# Altium PCB TB_brd.PcbDoc
Units mil, origin at the board's own origin, x right, y up, seen from the top; angles counter-clockwise.
Board outline 4448.82 x 3897.64 mil, 2 copper layers (Top Layer, Bottom Layer); 40 components, 28 nets, 144 pads, 92 vias.
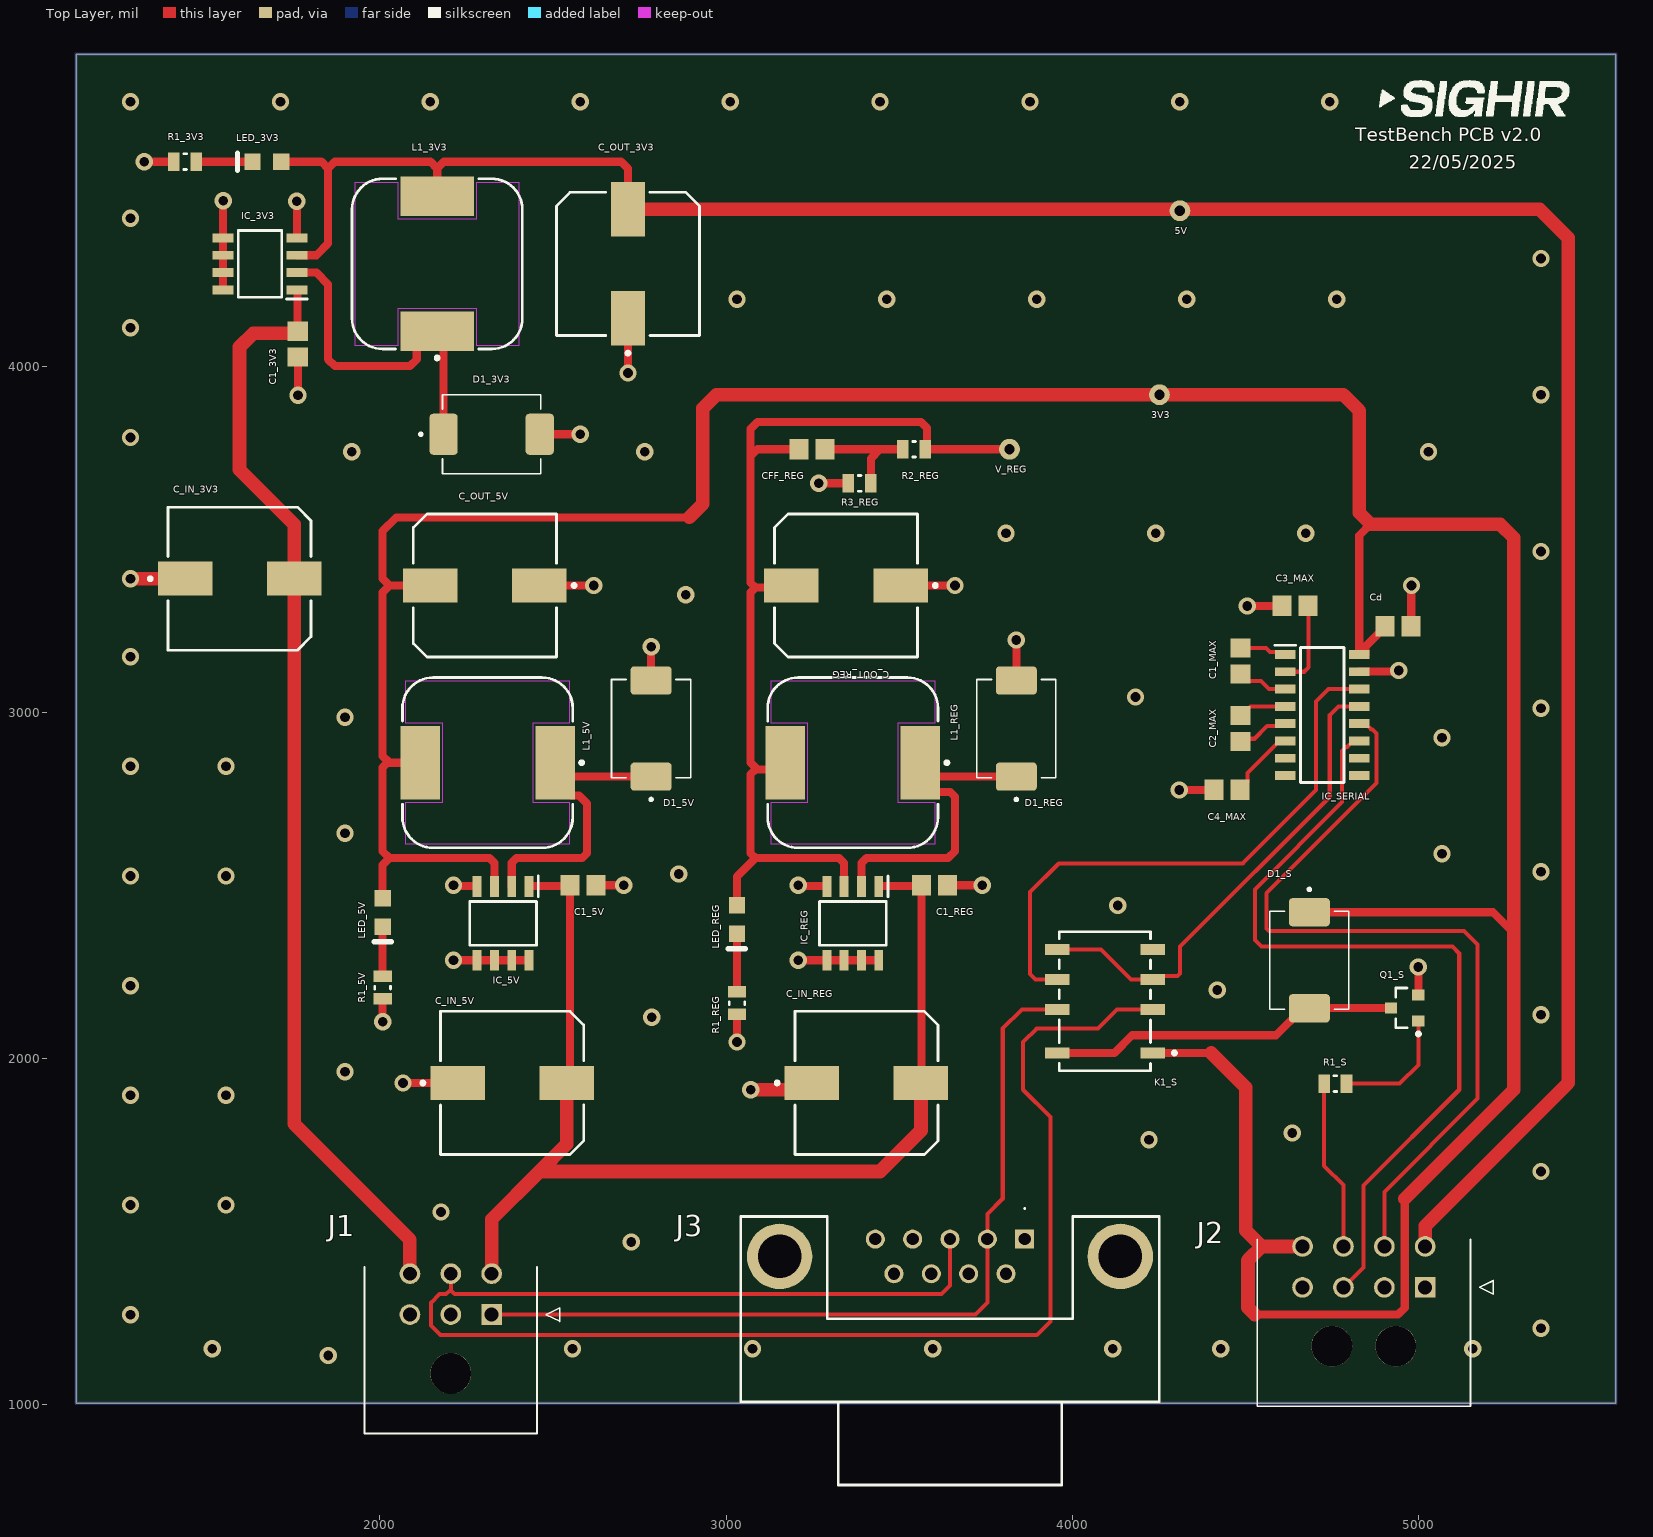
[diagram p0: Top Layer view]
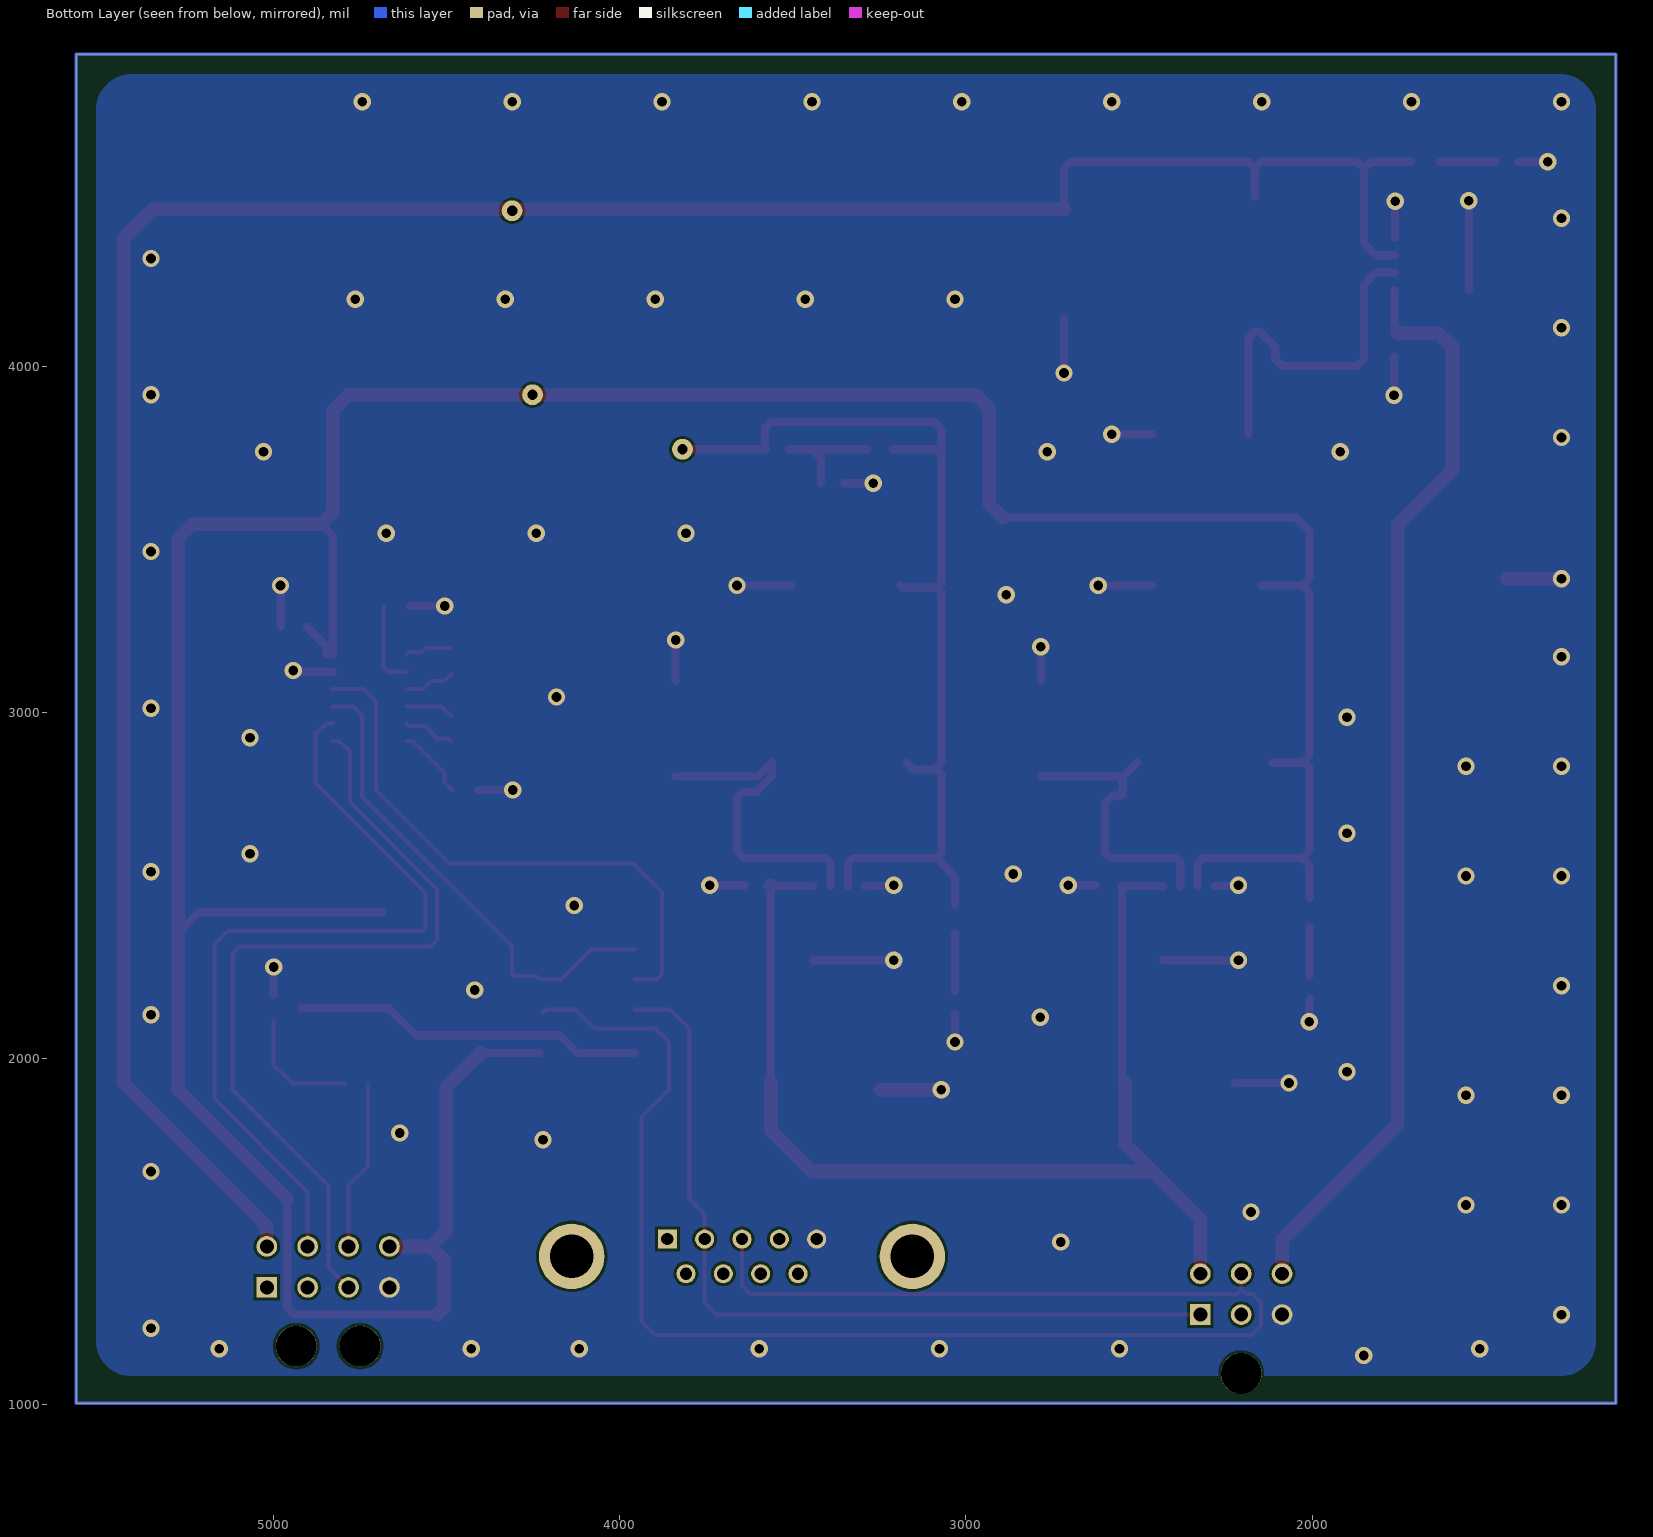
[diagram p1: Bottom Layer view, seen from below]
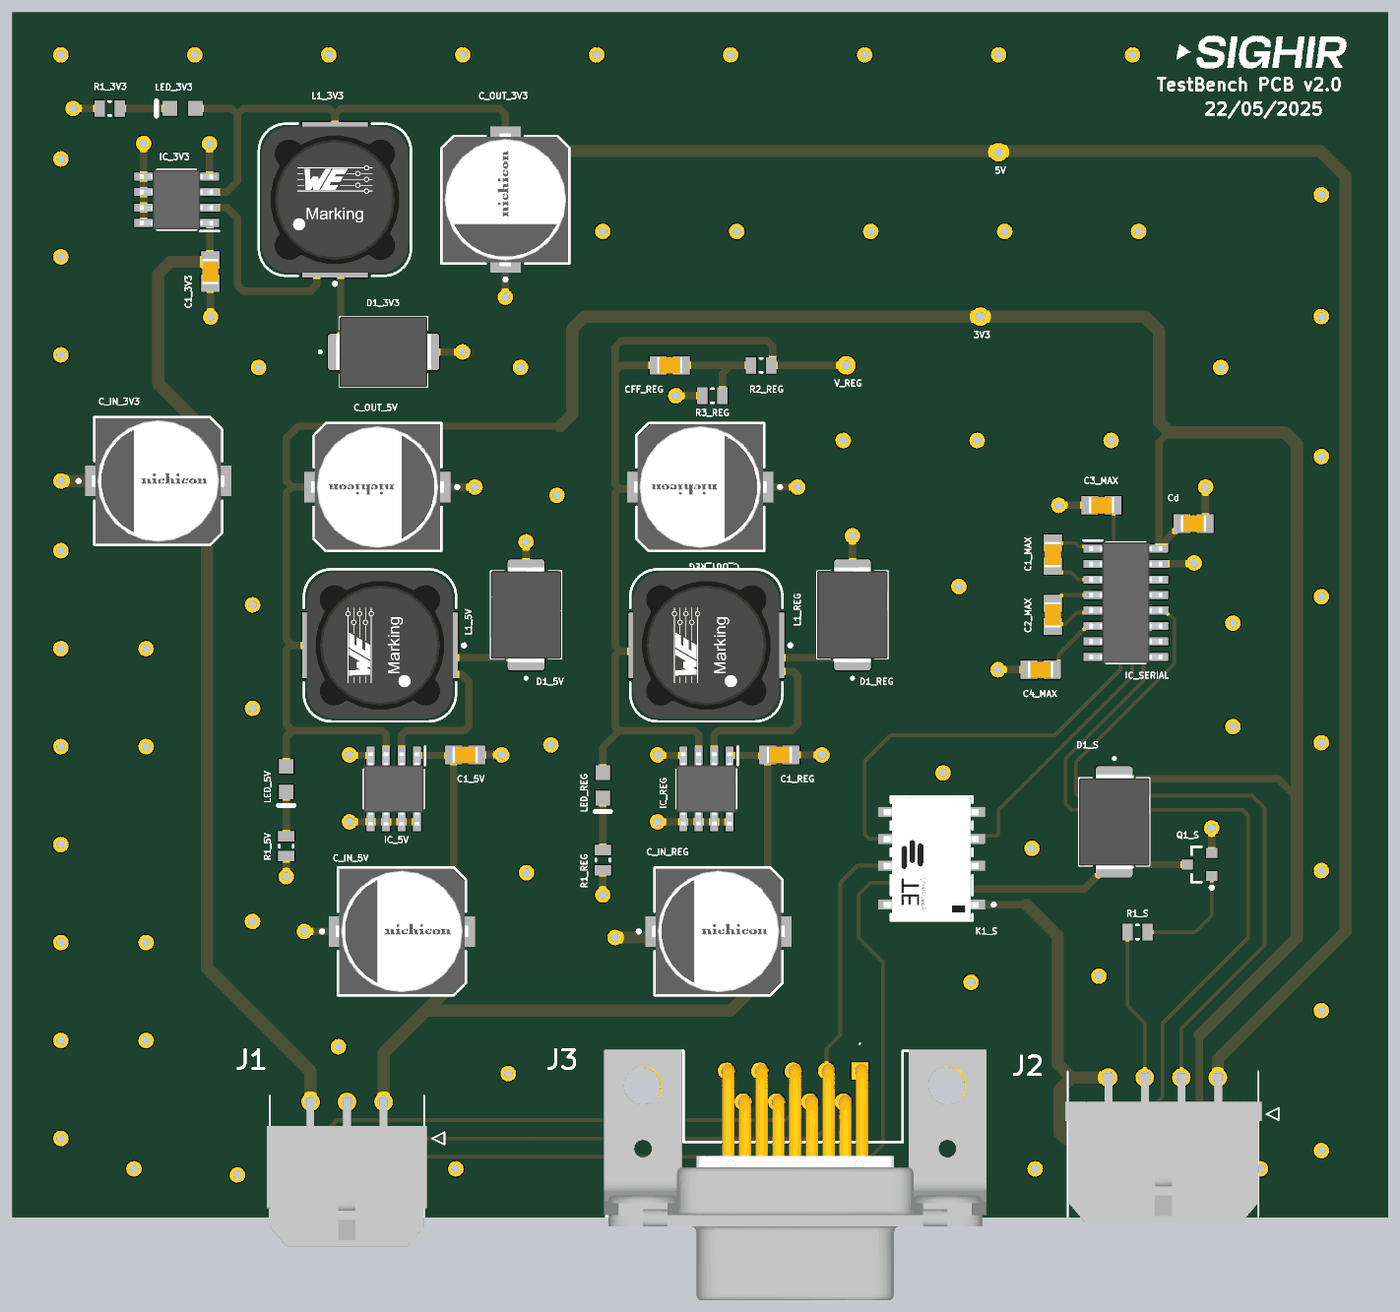
[diagram p2: 3D render of the assembled board from above, using the file's embedded part models]

## Layer stack, top to bottom
Top Solder: solder mask 0.4, Solder Resist, Dk 3.5
Top Layer: signal copper 1.4
Dielectric 1: dielectric 12.6, FR-4, Dk 4.8
Bottom Layer: signal copper 1.4
Bottom Solder: solder mask 0.4, Solder Resist, Dk 3.5

## Board outline
1122.05,1003.94 1122.05,4901.57 5570.87,4901.57 5570.87,1003.94

## Design rules (kind name [scope] priority, off if disabled: settings)
Clearance [All] p1: gap=7.87 ignorepadtopadclearanceinfootprint=FALSE
HoleSize [All] p1: absolutevalues=TRUE maxlimit=125.98 minlimit=1 maxpercent=80.000 minpercent=20.000
PolygonConnect [All] p1: connectstyle=Direct reliefconductorwidth=10 reliefentries=4 polygonreliefangle="90 Angle" airgapwidth=10
RoutingVias [All] p1: holewidth=28 width=50 viastyle="Through Hole" minholewidth=28 minwidth=50 maxholewidth=28 maxwidth=50
SilkToSolderMaskClearance [IsPad] p1: minsilkscreentomaskgap=7.87 clearancetoexposedcopper=TRUE
SolderMaskExpansion [All] p1: expansion=4 istentingtop=FALSE
SupplyNets "Schematic Supply Nets_5" [InNet('24V')] p1: voltage=0.000
SupplyNets "Schematic Supply Nets_4" [InNet('5V')] p2: voltage=0.000
SupplyNets "Schematic Supply Nets_3" [InNet('V_REG')] p3: voltage=0.000
SupplyNets "Schematic Supply Nets_2" [InNet('KEY_IN')] p4: voltage=0.000
SupplyNets "Schematic Supply Nets_1" [InNet('GND')] p5: voltage=0.000
SupplyNets "Schematic Supply Nets" [InNet('3V3_KEY')] p6: voltage=0.000
UnRoutedNet [All] p1: checkbadconnections=TRUE
Width [All] p1: maxlimit=39.37 minlimit=7.87 preferedwidth=11.81 minimp=50.000000 maximp=50.000000 favimp=50.000000
27 further rules are at their usual default settings.

## Components (designator, comment, footprint, x,y, rotation, side; value= is the part's Value field where it differs from the comment)
C1_3V3 "1uF/50V" CAPC2013X135X45LL10T25 1762.79,4063.22 r90 top
C1_5V "1uF/50V" CAPC2013X135X45LL10T25 2586.61,2500 r180 top
C1_MAX "0.1uF/50V" CAPC2013X135X45LL10T25 4486.22,3147.64 r270 top
C1_REG "1uF/50V" CAPC2013X135X45LL10T25 3602.36,2500 r180 top
C2_MAX "0.1uF/50V" CAPC2013X135X45LL10T25 4486.22,2952.76 r270 top
C3_MAX "0.1uF/50V" CAPC2013X135X45LL10T25 4643.7,3307.09 r180 top
C4_MAX "0.1uF/50V" CAPC2013X135X45LL10T25 4446.85,2775.59 r180 top
C_IN_3V3 "470uF/35V" FP-UCW1H221MNL1GS-MFG 1594.49,3385.83 r0 top
C_IN_5V "470uF/35V" FP-UCW1H221MNL1GS-MFG 2381.89,1929.13 r0 top
C_IN_REG "470uF/35V" FP-UCW1H221MNL1GS-MFG 3405.51,1929.13 r0 top
C_OUT_3V3 "270uF/35V" FP-UCW1H221MNL1GS-MFG 2716.54,4295.28 r90 top
C_OUT_5V "270uF/35V" FP-UCW1H221MNL1GS-MFG 2303.15,3366.14 r180 top
C_OUT_REG "270uF/35V" FP-UCW1H221MNL1GS-MFG 3346.46,3366.14 r180 top
Cd "0.1uF/50V" CAPC2013X135X45LL10T25 4940.94,3248.03 r180 top
CFF_REG "3.3nF/50V" CAPC2013X135X45LL10T25 3248.03,3759.84 r0 top
D1_3V3 "SK34-AQ" DIOM7958X250N 2322.83,3803.15 r0 top
D1_5V "SK34-AQ" DIOM7958X250N 2783.46,2952.76 r90 top
D1_REG "SK34-AQ" DIOM7958X250N 3838.58,2952.76 r90 top
D1_S "SK34-AQ" DIOM7958X250N 4685.04,2283.46 r270 top
IC_3V3 "XL1509-3V3E1" SOIC127P600X175-8N 1653.54,4295.28 r180 top
IC_5V "XL1509-5.0E1" SOIC127P600X175-8N 2355.71,2390.24 r270 top
IC_REG "XL1509-ADJE1" SOIC127P600X175-8N 3366.14,2390.24 r270 top
IC_SERIAL "MAX3232CSE+T" SOIC127P600X175-16N 4722.44,2992.13 r0 top
J1 "43045-0600" 43045-06(00,01,02,10) 2322.83,1259.84 r0 top
J2 "43045-0800" 43045-08(00,01,02,10) 5019.69,1338.58 r0 top
J3 "DB9" L77DFE09S1AMN 3862.6,1477.95 r0 top
K1_S "G6K-2F-Y-TR-DC5" FP-G6K-2F-Y-TR-DC5-MFG 4094.49,2165.35 r90 top
L1_3V3 "47uH" WE-PD_1280 2165.35,4295.28 r0 top
L1_5V "68uH" WE-PD_1280 2311.02,2854.33 r90 top
L1_REG "47uH" WE-PD_1280 3366.14,2854.33 r90 top
LED_3V3 "" AVAG-HSMX-C170_V 1673.23,4590.55 r180 top
LED_5V "" AVAG-HSMX-C170_V 2007.87,2421.26 r270 top
LED_REG "" AVAG-HSMX-C170_V 3031.5,2401.57 r270 top
Q1_S "MMBT2222LT1G" ONSC-SOT-23-3-318-08_V 4960.63,2145.67 r180 top
R1_3V3 "1K" RESC2013X50X30LL20T20 1437.01,4590.55 r180 top
R1_5V "1K" RESC2013X50X30LL20T20 2007.87,2204.72 r270 top
R1_REG "1K" RESC2013X50X30LL20T20 3031.5,2159.96 r270 top
R1_S "2K2" RESC2013X50X30LL20T20 4759.99,1927.25 r180 top
R2_REG "CRCW08050000Z0EA" RESC2013X50X30LL20T20 3543.31,3759.84 r0 top
R3_REG "CRCW08050000Z0EA" RESC2013X50X30LL20T20 3385.83,3661.42 r0 top

## Footprints (in the part's own frame and the unit in brackets; to place one, negate y for a bottom-side part, rotate by r counter-clockwise, add the part's x,y. Pads: shape width x height; smd on the part's side, far side on the other; paste and mask are expansions set on the pad)
43045-06(00,01,02,10) [mm]
  rect 1.52x1.52 hole 1.02: 1(0,0)
  round 1.52 hole 1.02: 2(-3,0) 3(-6,0) 4(0,3) 5(-3,3) 6(-6,3)
  round 3 hole 3 unplated: 7(-3,-4.32)
  silkscreen extent -9.33,-8.72 5,3.52, body extent -9.58,-8.89 3.57,3.34, height 8.69
43045-08(00,01,02,10) [mm]
  rect 1.52x1.52 hole 1.02: 1(0,0)
  round 1.52 hole 1.02: 2(-3,0) 3(-6,0) 4(-9,0) 5(0,3) 6(-3,3) 7(-6,3) 8(-9,3)
  round 3 hole 3 unplated: 9(-2.16,-4.32) 10(-6.84,-4.32)
  silkscreen extent -12.32,-8.72 5,3.52, body extent -12.54,-8.89 3.61,3.34, height 8.73
AVAG-HSMX-C170_V [mm] "SMD, 2-Leads, Body 2x1.25mm, Height 0.8mm"
  rect 1.2x1.2 smd: 1(-1.05,0) 2(1.05,0)
  silkscreen extent 2.15,-0.63 2.15,0.63, body extent -1,-0.63 1,0.63, height 0.8
CAPC2013X135X45LL10T25 [mm] "Chip Capacitor, 2-Leads, Body 2.10x1.35mm, IPC High Density"
  rect 1.4x1.5 smd: 1(-0.95,0) 2(0.95,0)
  body extent -1.05,-0.67 1.05,0.67, height 1.35
DIOM7958X250N [mm]
  rrect25% 2.07x3.01 smd: A(3.525,0) C(-3.525,0)
  silkscreen extent -5.3,-2.9 3.6,2.9, body extent -3.95,-2.9 3.95,2.9, height 2.2
FP-G6K-2F-Y-TR-DC5-MFG [mm]
  rect 0.8x1.8 smd paste+0 mask+0: 1(-3.8,-3.5) 2(-0.6,-3.5) 3(1.6,-3.5) 4(3.8,-3.5) 5(3.8,3.5) 6(1.6,3.5) 7(-0.6,3.5) 8(-3.8,3.5)
  silkscreen extent -5.1,-5.23 5.1,3.35, body extent -5.2,-4.5 5.2,4.5, height 0.25
FP-UCW1H221MNL1GS-MFG [mm]
  rect 4x2.5 smd paste+0 mask+0: 1(-4,0) 2(4,0)
  silkscreen extent -6.67,-5.25 5.25,5.25, body extent -6.25,-5.5 6.25,5.5, height 0.25
L77DFE09S1AMN [mm]
  rect 1.4x1.4 hole 0.9: 1(0,0)
  round 1.4 hole 0.9: 2(-2.74,0) 3(-5.48,0) 4(-8.22,0) 5(-10.96,0) 6(-1.37,-2.54) 7(-4.11,-2.54) 8(-6.85,-2.54) 9(-9.59,-2.54)
  round 4.8 hole 3.2: MH1(7.02,-1.27) MH2(-17.98,-1.27)
  silkscreen extent -20.83,-18.04 9.87,2.3, body extent -21.01,-18.85 10.39,1.75, height 13.89
ONSC-SOT-23-3-318-08_V [mm] "SOT23, 3-Leads, Body 2.92x1.3mm, Pitch 0.95mm"
  rect 0.9x0.8 smd: 1(-1,0.95) 2(-1,-0.95) 3(1,0)
  silkscreen extent -1.13,-1.46 0.65,2.02, body extent -0.65,-1.46 0.65,1.46, height 1.11
RESC2013X50X30LL20T20 [mm] "Chip Resistor, 2-Leads, Body 2.00x1.25mm, IPC High Density"
  rect 0.85x1.35 smd: 1(-0.825,0) 2(0.825,0)
  silkscreen extent -0.1,-0.58 0.1,0.58, body extent -1.1,-0.72 1.1,0.72, height 0.5
SOIC127P600X175-8N [mm]
  rect 1.525x0.65 smd: 1(-2.712,1.905) 2(-2.712,0.635) 3(-2.712,-0.635) 4(-2.712,-1.905) 5(2.712,-1.905) 6(2.712,-0.635) 7(2.712,0.635) 8(2.712,1.905)
  silkscreen extent -3.47,-2.45 1.6,2.58, body extent -3,-2.45 3,2.45, height 1.75
SOIC127P600X175-16N [mm]
  rect 1.525x0.65 smd: 1(-2.712,4.445) 2(-2.712,3.175) 3(-2.712,1.905) 4(-2.712,0.635) 5(-2.712,-0.635) 6(-2.712,-1.905) 7(-2.712,-3.175) 8(-2.712,-4.445) 9(2.712,-4.445) 10(2.712,-3.175) 11(2.712,-1.905) 12(2.712,-0.635) 13(2.712,0.635) 14(2.712,1.905) 15(2.712,3.175) 16(2.712,4.445)
  silkscreen extent -3.47,-4.95 1.6,5.12, body extent -3,-4.95 3,4.95, height 1.75
WE-PD_1280 [mm] "SMT Shielded Power Inductor, 2-leads, body 12x12mm"
  rect 5.4x2.9 smd: 1(0,-4.95) 2(0,4.95)
  Top Layer keep-out region: -6,6 -2.9,6 -2.9,3.3 2.9,3.3 2.9,6 6,6 6,-6 2.9,-6 2.9,-3.3 -2.9,-3.3 -2.9,-6 -6,-6
  silkscreen extent -6.25,-7.02 6.25,6.25, body extent -6,-6 6,6, height 7.51

## Part data
C1_3V3 C1_5V C1_MAX C1_REG C2_MAX C3_MAX C4_MAX Cd CFF_REG: library part CMP-1662-00015-2, "Chip Capacitor, 4.7 uF, +/- 10%, 16 V, -55 to 85 degC, 0805 (2012 Metric), RoHS, Tape and Reel", Capacitance="4.7 uF", Case Code (Imperial)=0805, Case Code (Metric)=2012, Max Operating Temperature="85 degC", Min Operating Temperature="-55 degC", Package Quantity=3000, PartNumber=GRM21BR61C475KA88L, Tolerance=10%, Type (Capacitors)=X5R, Voltage Rating="16 V", Case\/Package=0805, ComponentLink1Description="Manufacturer URL", ComponentLink1URL=http://www.murata.com/, ComponentLink2Description=Datasheet, ComponentLink2URL=http://search.murata.co.jp/Ceramy/image/img/A01X/G101/ENG/GRM21BR61C475KA88-01.pdf, DatasheetVersion=03/2016, Height="1.25 mm", Length="2 mm", Mount="Surface Mount", Mounting Technology="Surface Mount", PackageDescription="2-Pin Surface Mount Device, Body 2 x 1.25 mm", PackageReference=0805, Packaging="Tape and Reel", Pins=2, Radiation Hardening=No, REACH SVHC="No SVHC", RoHSCompliant=true, Voltage Rating (DC)="16 V", Width="1.25 mm"
C_IN_3V3 C_IN_5V C_IN_REG C_OUT_3V3 C_OUT_5V C_OUT_REG: library part CMP-12462-000041-1, "CAP ALUM 220UF 20% 50V SMD", Capacitance=220uF, Case/Package=Radial, Dielectric Material=Aluminium, Leakage Current=3uA, Max Operating Temperature=105°C, Min Operating Temperature=-25°C, Package Quantity=500, Ripple Current=670mA, Tolerance=20%, Voltage=50V, Construction=Cylindrical, Diameter=10mm, Dissipation Factor=0.14%, Features="General Purpose", Height=10mm, Height - Seated (Max)=0.394inch, Impedance=350mR, Length=10mm, Life (Hours)=7000Hour, Mount="Surface Mount", Packaging="Tape and Reel", Radiation Hardening=No, REACH SVHC="No SVHC", Ripple Current (AC)=670mA, RoHS Compliant=Yes, Series=CW, Termination=SMD/SMT, Voltage Rating=50V, Voltage Rating (DC)=50V, Width=10.3mm
D1_3V3 D1_5V D1_REG D1_S: Package=None, Availability=Unavailable, MF="Diotec Semiconductor", MP=SK34-AQ, Price=None
IC_3V3 IC_REG: library part XL1509-5.0E1, "Integrated Circuit", Manufacturer_Name=XLSEMI, Datasheet Link=https://datasheet.lcsc.com/szlcsc/XLSEMI-XL1509-5-0E1_C61063.pdf, Height=1.75mm, Manufacturer_Part_Number=XL1509-5.0E1
IC_5V: "Integrated Circuit", Manufacturer_Name=XLSEMI, Datasheet Link=https://datasheet.lcsc.com/szlcsc/XLSEMI-XL1509-5-0E1_C61063.pdf, Height=1.75mm, Manufacturer_Part_Number=XL1509-5.0E1
IC_SERIAL: "Integrated Circuit", Manufacturer_Name="Analog Devices", Mouser Part Number=700-MAX3232CSET, Arrow Part Number=MAX3232CSE+T, Arrow Price/Stock=https://www.arrow.com/en/products/max3232cset/analog-devices?utm_currency=USD&region=nac, Datasheet Link=https://datasheets.maximintegrated.com/en/ds/MAX3222-MAX3241.pdf, Height=1.75mm, Manufacturer_Part_Number=MAX3232CSE+T, Mouser Price/Stock=https://www.mouser.co.uk/ProductDetail/Analog-Devices-Maxim-Integrated/MAX3232CSE%2bT?qs=CDqwynd4ZNoTB%252BLjbeQ4Qg%3D%3D
J1: "Connector", Manufacturer_Name=Molex, Mouser Part Number=538-43045-0600, Arrow Part Number=43045-0600, Arrow Price/Stock=https://www.arrow.com/en/products/43045-0600/molex?region=nac, Datasheet Link=https://www.molex.com/pdm_docs/sd/430450200_sd.pdf, Height=9.9mm, Manufacturer_Part_Number=43045-0600, Mouser Price/Stock=https://www.mouser.co.uk/ProductDetail/Molex/43045-0600?qs=mrPiglD9aYJ8CzJ%2FE2PNbw%3D%3D
J2: "Connector", Manufacturer_Name=Molex, Mouser Part Number=538-43045-0800, Datasheet Link=https://www.molex.com/pdm_docs/sd/430450200_sd.pdf, Height=8.77mm, Manufacturer_Part_Number=43045-0800, Mouser Price/Stock=https://www.mouser.co.uk/ProductDetail/Molex/43045-0800?qs=MGlPTwjtJ4Z70Z3DbkGxKw%3D%3D
J3: library part L77DFE09S1AMN, "Connector", Manufacturer_Name="Amphenol Communications Solutions", Mouser Part Number=523-L77DFE09S1AMN, Datasheet Link=https://cdn.amphenol-icc.com/media/wysiwyg/files/drawing/l77dfxxxs1amn.pdf, Height=12.7mm, Manufacturer_Part_Number=L77DFE09S1AMN, Mouser Price/Stock=https://www.mouser.co.uk/ProductDetail/Amphenol-Commercial-Products/L77DFE09S1AMN?qs=mq7kV%2Fq8lk7eGEI8ax9brw%3D%3D
K1_S: library part CMP-08823-000003-1, "RELAY TELECOM DPDT 1A 5VDC", Ambient Temperature Range High=+70°C, Ambient Temperature Range Low=-40°C, Coil Current=21.1mA, Coil Power=100mW, Coil Resistance=237Ω, Coil Voltage=5V, Current Rating=2A, Manufacturer=Omron, Switching Current=1A, Temperature="-40°C to +70°C", Automotive=No, Category=Relay, Coil Type=Non-Latching, ComponentLink2Description=Datasheet, ComponentLink2URL=https://omronfs.omron.com/en_US/ecb/products/pdf/en-g6k.pdf, Device Class L1=Electromechanical, Device Class L2=Relays, Device Class L3="Signal Relays", Digikey Description="RELAY TELECOM DPDT 1A 5VDC", Height=5.4mm, Lead Free=Yes, Manufacturer Part Number=G6K-2F-Y-TR-DC5, Mouser Description="Electromechanical Relay DPDT 1A 5VDC 237Ohm Surface Mount", Number Of Contacts=2, Octopart=https://octopart.com/g6k-2f-y-tr-dc5-omron-697853, Package=G6K-2F-Y-TR-DC5, RoHS=TRUE, Standoff Height=0.3mm, Temperature Range High=+70°C, Temperature Range Low=-40°C, Throw Configuration=DPDT
L1_3V3 L1_5V L1_REG: library part CMP-0227-00190-2, Ambient Temperature Range High=85°C, Ambient Temperature Range Low=-40°C, Case/Package=Nonstandard, Current Rating=980mA, DC Resistance (DCR)=450mΩ, Inductance=470µH, Inductance Tolerance=20%, Max DC Current=900mA, Max Operating Temperature=125°C, Resistance=980mΩ, Self Resonant Frequency=2.6MHz, Test Frequency=1kHz, Composition=Wirewound, Core Material=Ferrite, Depth=12mm, Height=8mm, Height - Seated (Max)=8.001mm, Lead Pitch=7mm, Length=12mm, Min Operating Temperature=-40°C, Mount="Surface Mount", NexarPartId=8917154, Number of Pins=2, Packaging="Tape & Reel (TR)", REACH SVHC=Unknown, RMS Current (Irms)=900mA, RoHS=Compliant, Saturation Current=900mA, Series Resistance=980mΩ, Shielding=Shielded, Termination=SMD/SMT, Tolerance=20%, Weight=4.535924g, Width=12mm
LED_3V3 LED_5V LED_REG: library part CMP-2000-05062-1, "Chip LED, Green, 2.2 V, -40 to 85 degC, 2-Pin SMD, Pb-Free, Tape and Reel", Forward Current If=20mA, Forward Voltage=2.2V, Forward Voltage VF Max=2.6V, LED Colour=Green, Manufacturer=Avago, Operating Temperature Max=85degC, Operating Temperature Min=-30degC, Operating Temperature Range=-30degCto+85degC, Opto Case Style=SMD, Package Description="2-Pin Surface Mount Device, Body 2 x 1.25 mm, Height 0.8 mm", Package Reference=HSMX-C170, Storage Temperature Min=-40degC, Bulb Size=1.25mmx1.4mm, Datasheet URL=https://datasheet.ciiva.com/29280/180495-da-01-en-chip-led-hsmg-c170-gelb-gruen-29280971.pdf, Datasheet Version=Oct-08, Dominant Wavelength=572nm, Dominant Wavelength Typ=572nm, External Depth=0.8mm, External Length / Height=2mm, External Width=1.25mm, Forward Current If Max=20mA, LED Mounting=SMD, LED Type=Standard, Lens Shape=Rectangular, Light Area Height=1mm, Luminous Intensity=15mcd, Luminous Intensity Min=4mcd, Luminous Intensity Typ=15mcd, Manufacturer URL=http://www.avagotech.com/, Mounting Type=SMD, MSL=MSL2A-4weeks, No. of Pins=2, Opto Mounting Orientation=Top, Packaging=CutTape, Peak Forward Current=20mA, Peak Wavelength=570nm, PIV Max=5V, Storage Temperature Max=85degC, SVHC=NoSVHC(16-Jun-2014), Viewing Angle=170deg, Voltage Vf Typ=2.2V, Wavelength Typ=570nm
Q1_S: library part CMP-0722-00001-2, "General Purpose Transistor, NPN Silicon, 3-Pin SOT-23, Pb-Free, Tape and Reel", Manufacturer="On Semiconductor", ComponentLink1Description="Manufacturer URL", ComponentLink1URL=http://www.onsemi.com/, ComponentLink2Description=Datasheet, ComponentLink2URL=http://www.onsemi.cn/pub_link/Collateral/MMBT2222LT1-D.PDF, ComponentLink3Description="Package Specification", ComponentLink3URL=http://www.onsemi.cn/pub_link/Collateral/318-08.PDF, DatasheetVersion="Rev. 10", fT Min (MHz)=250, IC Continuous (A)=0.6, Mounting Technology="Surface Mount", PackageDescription="3-Pin Small Outline Transistor, Body 2.92 x 1.3 mm, Pitch 0.95 mm", PackageReference=SOT-23-3-318-08, PackageVersion="Rev. AP, 11/2009", Packing="Tape and Reel", PartNumber=MMBT2222LT1G, Polarity=NPN, RoHS=TRUE
R1_3V3 R1_5V R1_REG R1_S: library part CMP-2001-04896-1, Manufacturer="Vishay Dale", Part Number=CRCW08050000Z0EA
R2_REG R3_REG: library part CMP-2001-04896-1, Manufacturer="Vishay Dale", Part Number=CRCW08050000Z0EA

## Free pads (board coordinates)
  round 60 hole 30: 2(4311.02,4448.82) 3(4251.97,3917.32) 4(3818.9,3759.84)

## Via types
v1: diameter 50, hole 28, Top Layer to Bottom Layer, 92 vias

## Nets (pads, with @x,y where several pads share a name; then routed paths per layer and width w, separated by ;. In a path a pad name is that pad's centre, name@x,y a point inside that pad or via, vN(x,y) a via of type N, cw(c..) or ccw(c..) an arc to the next point about the centre after c; other vN are vias at no path point)
3V3_KEY: C_OUT_3V3.2 IC_3V3.3 J2.5 L1_3V3.2 LED_3V3.1 pad.2 | length 7478.4
  Top Layer w23.62: LED_3V3.1 1830.71,4590.55 1850.39,4570.87 ; IC_3V3.3 1816.34,4320.28 1850.39,4354.33 1850.39,4570.87 ; C_OUT_3V3.2 2716.54,4570.87 2696.85,4590.55 2185.04,4590.55 2165.35,4570.87 ; 1850.39,4570.87 1870.08,4590.55 2145.67,4590.55 2165.35,4570.87 ; 2165.35,4570.87 L1_3V3.2 2165.35,4570.87
  Top Layer w39.37: C_OUT_3V3.2 5350.39,4452.76 5433.07,4370.08 5433.07,1929.13 5019.69,1515.75 J2.5
5V: C_OUT_5V.2 Cd.2 D1_S.C IC_5V.3 IC_SERIAL.16 J2.8 K1_S.1 L1_5V.2 LED_5V.1 pad.3 | length 10684.5
  Top Layer w23.62: LED_5V.1 2007.87,2559.05 2027.56,2578.74 ; L1_5V.2 2027.56,2854.33 ; C_OUT_5V.2 2027.56,3366.14 ; IC_5V.3 2330.71,2564.9 2316.87,2578.74 2027.56,2578.74 ; 2893.7,3562.99 2047.24,3562.99 2007.87,3523.62 2007.87,3385.83 2027.56,3366.14 ; K1_S.1 4401.57,2015.75 ; 4527.56,1259.84 4940.94,1259.84 4960.63,1279.53 4960.63,1594.49 ; D1_S.C 5215.55,2422.24 5275.59,2362.2 ; 4862.2,3543.31 4829.21,3510.32 IC_SERIAL.16 4846.44,3167.13 4847.42,3168.11 4847.42,3189.94 4903.54,3246.06 Cd.2 ; 2027.56,2578.74 2007.87,2598.43 2007.87,2840.49 2021.71,2854.33 2027.56,2854.33 ; 2027.56,2854.33 2007.87,2874.02 2007.87,3346.46 2027.56,3366.14
  Top Layer w39.37: 2893.7,3562.99 2933.07,3602.36 2933.07,3877.95 2972.44,3917.32 3010.45,3917.32 4783.46,3917.32 4829.37,3871.41 4829.37,3576.14 4862.2,3543.31 5236.22,3543.31 5275.59,3503.94 5275.59,2362.2 5275.59,1909.45 4960.63,1594.49 ; 4401.57,2015.75 4501.28,1916.04 4501.28,1502.66 4547.24,1456.69 ; 4527.56,1259.84 4507.87,1279.53 4507.87,1417.32 4547.24,1456.69 ; J2.8 4547.24,1456.69
24V: C1_5V.2 C1_REG.2 C_IN_5V.2 C_IN_REG.2 IC_5V.1 IC_REG.1 J1.4 | length 3319.6
  Top Layer w23.62: IC_5V.1 2430.71,2497.52 2431.69,2498.5 2547.72,2498.5 C1_5V.2 2549.21,1938.98 C_IN_5V.2 ; IC_REG.1@3442.64,2498.5 C1_REG.2@3563.46,2498.5 ; C_IN_REG.2@3564.96,1931.1 C1_REG.2
  Top Layer w39.37: J1.4 2322.83,1535.43 2460.63,1673.23 ; C_IN_5V.2 2539.37,1751.97 2460.63,1673.23 ; C1_REG.2@3563.46,2498.5 C1_REG.2 ; C_IN_REG.2@3564.96,1931.1 C_IN_REG.2 3562.99,1791.34 3444.88,1673.23 2460.63,1673.23
C1: C1_MAX.2 IC_SERIAL.3 | length 147.3
  Top Layer w11.81: C1_MAX.2 4505.91,3090.55 4545.28,3090.55 4568.7,3067.13 IC_SERIAL.3
D1_Q1: D1_S.A K1_S.8 Q1_S.3 | length 1018.4
  Top Layer w23.62: K1_S.8 4122.05,2015.75 4173.23,2066.93 4588.78,2066.93 4666.54,2144.69 D1_S.A 4685.53,2145.18 4920.77,2145.18 Q1_S.3
GND: C1_3V3.1 C1_5V.1 C1_REG.1 C3_MAX.2 C4_MAX.2 C_IN_3V3.1 C_IN_5V.1 C_IN_REG.1 C_OUT_3V3.1 C_OUT_5V.1 C_OUT_REG.1 Cd.1 D1_3V3.A D1_5V.A D1_REG.A IC_3V3.4 IC_3V3.5 IC_3V3.6 IC_3V3.7 IC_3V3.8 IC_5V.4 IC_5V.5 IC_5V.6 IC_5V.7 IC_5V.8 IC_REG.4 IC_REG.5 IC_REG.6 IC_REG.7 IC_REG.8 IC_SERIAL.15 J1.3 J2.4 J3.5 Q1_S.2 R1_3V3.2 R1_5V.2 R1_REG.2 R3_REG.1 | length 3391.3
  Top Layer w23.62: v1(1318.9,4590.55) R1_3V3.2 ; IC_3V3.8 IC_3V3.7 IC_3V3.6 IC_3V3.5 1546.96,4370.46 1546.96,4477.15 v1(1547.14,4477.34) ; v1(1759.97,4476.06) 1760.14,4475.88 1760.14,4370.45 IC_3V3.4 ; C1_3V3.1 1763.13,4025.49 1763.13,3916.19 v1(1763.46,3915.85) ; v1(2007.87,2106.3) R1_5V.2 ; v1(2066.93,1929.13) C_IN_5V.1 ; v1(2212.6,2283.46) IC_5V.5 IC_5V.6 IC_5V.7 IC_5V.8 ; v1(2212.6,2500) 2214.09,2498.5 2279.72,2498.5 2280.71,2497.52 IC_5V.4 ; C_OUT_5V.1 v1(2618.11,3366.14) ; D1_3V3.A v1(2578.74,3803.15) ; C1_5V.1 v1(2704.72,2500) ; v1(2716.54,3980.32) C_OUT_3V3.1 ; D1_5V.A v1(2783.46,3188.98) ; v1(3031.5,2047.24) R1_REG.2 ; v1(3208.66,2283.46) IC_REG.5 IC_REG.6 IC_REG.7 IC_REG.8 ; v1(3208.66,2500) 3210.16,2498.5 3290.16,2498.5 3291.14,2497.52 IC_REG.4 ; v1(3267.72,3661.42) R3_REG.1 ; J3.5@3429.18,1479.87 J3.5 ; C_OUT_REG.1 v1(3661.42,3366.14) ; C1_REG.1 v1(3740.16,2500) ; D1_REG.A v1(3838.58,3208.66) ; v1(4309.06,2775.59) C4_MAX.2 ; v1(4505.91,3307.09) C3_MAX.2 ; IC_SERIAL.15 4830.2,3118.11 4940.83,3118.11 v1(4943.45,3120.73) ; Cd.1 4979.33,3249.02 4979.33,3365.16 v1(4980.31,3366.14) ; Q1_S.2 v1(5000,2263.78)
  Top Layer w39.37: v1(1279.53,3385.83) C_IN_3V3.1 ; v1(3070.87,1909.45) C_IN_REG.1@3248.03,1909.45
  other v1: 1850.39,1141.73 1515.75,1161.42 2556.24,1161.42 3076.49,1161.42 3596.74,1161.42 4116.98,1161.42 4429.13,1161.42 5157.48,1161.42 5354.33,1220.47 1279.53,1259.84 2725.91,1469.49 2176.66,1556.41 1279.53,1576.59 1555.12,1576.59 5354.33,1673.23 4221.97,1764.76 4635.35,1784.45 1279.53,1893.34 1555.12,1893.34 1899.13,1961.61 2784.96,2119.09 5354.33,2125.98 4418.82,2197.83 1279.53,2210.09 4131.42,2441.93 1279.53,2526.84 1555.12,2526.84 2863.7,2532.48 5354.33,2539.37 5068.42,2591.54 1899.13,2650.59 1279.53,2843.59 1555.12,2843.59 5068.42,2926.18 1899.13,2985.24 5354.33,3011.81 4182.6,3044.29 1279.53,3160.34 2883.39,3339.57 5354.33,3464.57 3808.58,3516.73 4241.65,3516.73 4674.72,3516.73 1918.82,3752.95 2765.28,3752.95 5029.05,3752.95 1279.53,3793.84 5354.33,3917.32 1279.53,4110.59 3031.5,4192.91 3464.57,4192.91 3897.64,4192.91 4330.71,4192.91 4763.78,4192.91 5354.33,4311.02 1279.53,4427.34 1279.53,4763.78 1712.6,4763.78 2145.67,4763.78 2578.74,4763.78 3011.81,4763.78 3444.88,4763.78 3877.95,4763.78 4311.02,4763.78 4744.09,4763.78
GPIO: J2.7 R1_S.2 | length 493.7
  Top Layer w11.81: R1_S.2 4727.51,1689.81 4783.46,1633.86 J2.7
KEY_IN: C1_3V3.2 C_IN_3V3.2 IC_3V3.1 J1.6 | length 3180.8
  Top Layer w23.62: IC_3V3.1 1761.55,4219.04 C1_3V3.2@1761.55,4101.86
  Top Layer w39.37: C1_3V3.2@1752.95,4100.62 1752.95,4094.49 1633.86,4094.49 1594.49,4055.12 1594.49,3700.79 1751.97,3543.31 C_IN_3V3.2 1751.97,1811.02 2086.61,1476.38 J1.6
NetC1_MAX_1: C1_MAX.1 IC_SERIAL.1 | length 136.9
  Top Layer w11.81: C1_MAX.1 4560.17,3185.04 4571.19,3174.02 4608.78,3174.02 IC_SERIAL.1
NetC2_MAX_1: C2_MAX.1 IC_SERIAL.4 | length 140.6
  Top Layer w11.81: C2_MAX.1 4488.19,2990.16 4515.16,3017.13 IC_SERIAL.4
NetC2_MAX_2: C2_MAX.2 IC_SERIAL.5 | length 150.9
  Top Layer w11.81: C2_MAX.2 4494.31,2923.44 4526.55,2923.44 4563.34,2960.24 4608.78,2960.24 IC_SERIAL.5
NetC3_MAX_1: C3_MAX.1 IC_SERIAL.2 | length 250.7
  Top Layer w11.81: IC_SERIAL.2 4670.28,3117.13 4683.07,3129.92 4683.07,3305.12 C3_MAX.1
NetC4_MAX_1: C4_MAX.1 IC_SERIAL.6 | length 206.1
  Top Layer w11.81: C4_MAX.1 4505.91,2797.24 4505.91,2824.59 4598.44,2917.13 IC_SERIAL.6
NetCFF_REG_2: CFF_REG.2 R2_REG.1 R3_REG.2 | length 334.8
  Top Layer w23.62: CFF_REG.2 3444.88,3759.84 ; R3_REG.2 3418.31,3733.27 3444.88,3759.84 ; R2_REG.1 3444.88,3759.84
NetLED_3V3_2: LED_3V3.2 R1_3V3.1 | length 162.4
  Top Layer w23.62: R1_3V3.1 LED_3V3.2
NetLED_5V_2: LED_5V.2 R1_5V.1 | length 142.7
  Top Layer w23.62: R1_5V.1 LED_5V.2
NetLED_REG_2: LED_REG.2 R1_REG.1 | length 167.8
  Top Layer w23.62: R1_REG.1 LED_REG.2
NetQ1_S_1: Q1_S.1 R1_S.1 | length 356.9
  Top Layer w11.81: R1_S.1 4945.95,1927.25 5000,1981.3 Q1_S.1
RX_EXT: J1.5 J3.3 K1_S.2 | length 4840.6
  Top Layer w11.81: J1.5@2204.99,1377.69 2204.99,1330.02 ; J3.3 3646.85,1343.7 3622.05,1318.9 2216.11,1318.9 2204.99,1330.02 ; K1_S.2@4222.44,2131.89 4212.6,2141.73 4129.92,2141.73 4074.8,2086.61 3897.64,2086.61 3858.27,2047.24 3858.27,1909.45 3937.01,1830.71 3937.01,1240.16 3897.64,1200.79 2175.48,1200.79 2147.61,1228.66 2147.61,1293.99 2172.52,1318.9 2191.17,1318.9 2202.29,1330.02 2204.99,1330.02
RX_MIC: IC_SERIAL.12 J2.6 | length 2370
  Top Layer w11.81: IC_SERIAL.12 4846.44,2967.13 4863.96,2949.61 4867.39,2949.61 4878.92,2938.07 4878.92,2795.1 4561.02,2477.21 4561.02,2375.03 4568.34,2367.72 4744.03,2367.72 4744.43,2368.11 5131.89,2368.11 5171.26,2328.74 5171.26,1883.86 4901.57,1614.17 J2.6
RX_RELAY: IC_SERIAL.13 K1_S.3 K1_S.5 | length 1419
  Top Layer w11.81: K1_S.5 4082.68,2314.96 4169.29,2228.35 K1_S.3 4242.13,2238.19 4304.1,2238.19 4311.02,2245.11 4311.02,2322.83 4744.09,2755.91 4744.09,2992.13 4769.09,3017.13 IC_SERIAL.13
SW_3V3: D1_3V3.C IC_3V3.2 L1_3V3.1 | length 1011.2
  Top Layer w23.62: IC_3V3.2 1816.34,4270.28 1850.39,4236.22 1850.39,4019.69 1870.08,4000 2086.61,4000 2106.3,4019.68 2106.3,4055.12 2151.57,4100.39 L1_3V3.1 2184.06,4081.69 D1_3V3.C
SW_5V: D1_5V.C IC_5V.2 L1_5V.1 | length 847.2
  Top Layer w23.62: IC_5V.2 2380.71,2564.9 2394.55,2578.74 2584.59,2578.74 2598.43,2592.58 2598.43,2736.22 2574.8,2759.84 2551.18,2759.84 2546.75,2764.27 2546.75,2813.48 L1_5V.1 ; L1_5V.1@2547.24,2813.98 D1_5V.C
SW_REG: D1_REG.C IC_REG.2 L1_REG.1 | length 967.7
  Top Layer w23.62: IC_REG.2 3391.14,2564.37 3405.51,2578.74 3641.73,2578.74 3661.42,2598.43 3661.42,2755.91 3647.58,2769.74 3606.3,2769.74 3561.02,2815.02 L1_REG.1 3601.38,2813.98 D1_REG.C
TX_EXT: J1.1 J3.2 K1_S.7 | length 2437.5
  Top Layer w11.81: J1.1 3720.47,1259.84 3754.95,1294.32 3754.95,1376.02 3754.72,1376.25 J3.2 3754.72,1550 3799.21,1594.49 3799.21,2086.61 3854.33,2141.73 K1_S.7
TX_MIC: IC_SERIAL.11 J2.3 | length 2421.7
  Top Layer w11.81: J2.3 4840.97,1396.08 4840.97,1632.3 5118.11,1909.45 5118.11,2303.15 5098.43,2322.83 4547.24,2322.83 4527.56,2342.52 4527.56,2488.28 4779.51,2740.23 4779.51,2888.07 4791.04,2899.61 4794.47,2899.61 4811.99,2917.13 IC_SERIAL.11
TX_RELAY: IC_SERIAL.14 K1_S.6 | length 1665.7
  Top Layer w11.81: K1_S.6 3893.7,2228.35 3877.95,2244.09 3877.95,2480.32 3961.08,2563.44 4492.58,2563.44 4704.72,2775.59 4704.72,3031.5 4740.35,3067.13 IC_SERIAL.14
V_REG: C_OUT_REG.2 CFF_REG.1 IC_REG.3 L1_REG.2 LED_REG.1 pad.4 R2_REG.2 | length 2955.4
  Top Layer w23.62: LED_REG.1 3031.5,2525.53 3084.7,2578.74 ; L1_REG.2 3151.57,2834.65 3106.3,2834.65 ; C_OUT_REG.2 3183.13,3360.29 3084.7,3360.29 ; CFF_REG.1 3090.55,3759.84 3070.87,3740.16 ; IC_REG.3 3341.14,2564.37 3326.77,2578.74 3084.7,2578.74 ; pad.4 R2_REG.2 3580.71,3764.76 3580.71,3820.87 3562.99,3838.58 3090.55,3838.58 3070.87,3818.9 3070.87,3740.16 ; 3070.87,3740.16 3070.87,3374.13 3084.7,3360.29 ; 3084.7,2578.74 3070.87,2592.58 3070.87,2820.81 3084.7,2834.65 3106.3,2834.65 ; 3084.7,3360.29 3070.87,3346.46 3070.87,2854.33 3090.55,2834.65 3106.3,2834.65
pads on no net: IC_SERIAL.7 IC_SERIAL.8 IC_SERIAL.9 IC_SERIAL.10 J1.2 J1.7 J2.1 J2.2 J2.9 J2.10 J3.1 J3.4 J3.6 J3.7 J3.8 J3.9 J3.MH1 J3.MH2 K1_S.4
copper on no net: | length 16692.9
  Bottom Layer w10: 1122.05,1003.94 5570.87,1003.94 5570.87,4901.57 1122.05,4901.57 1122.05,1003.94

## Polygon pours and split planes (outlines as drawn)
GND on Bottom Layer "GND_L02_P000" (solid, pour order 0): 1181.1,4742.52 cw(c1281.1,4742.52) 1281.1,4842.52 5411.81,4842.52 cw(c5411.81,4742.52) 5511.81,4742.52 5511.81,1182.68 cw(c5411.81,1182.68) 5411.81,1082.68 1281.1,1082.68 cw(c1281.1,1182.68) 1181.1,1182.68

## Silkscreen, mask and mechanical layers (free items; w line width, h text height)
Top Overlay:
  drawing of 7 lines, arcs and shapes, not listed
  text "TestBench PCB v2.0" at 4817.43,4649.02 h39.37
  text "22/05/2025" at 4971.58,4570.28 h39.37
  text "5V" at 4296.08,4380.93 h19.68
  text "3V3" at 4227.59,3849.14 h19.68
  text "V_REG" at 3777.72,3692.62 h19.68